# Altium PCB LeggieroRevB.PcbDoc
Units mil, origin at the board's own origin, x right, y up, seen from the top; angles counter-clockwise.
Board outline 2720 x 2260 mil, 4 copper layers (L1, L2, L3, L4), stack 61.2 mil thick; 24 components, 19 nets, 89 pads, 137 vias.
Unrouted connection lines stored in the file: 28.
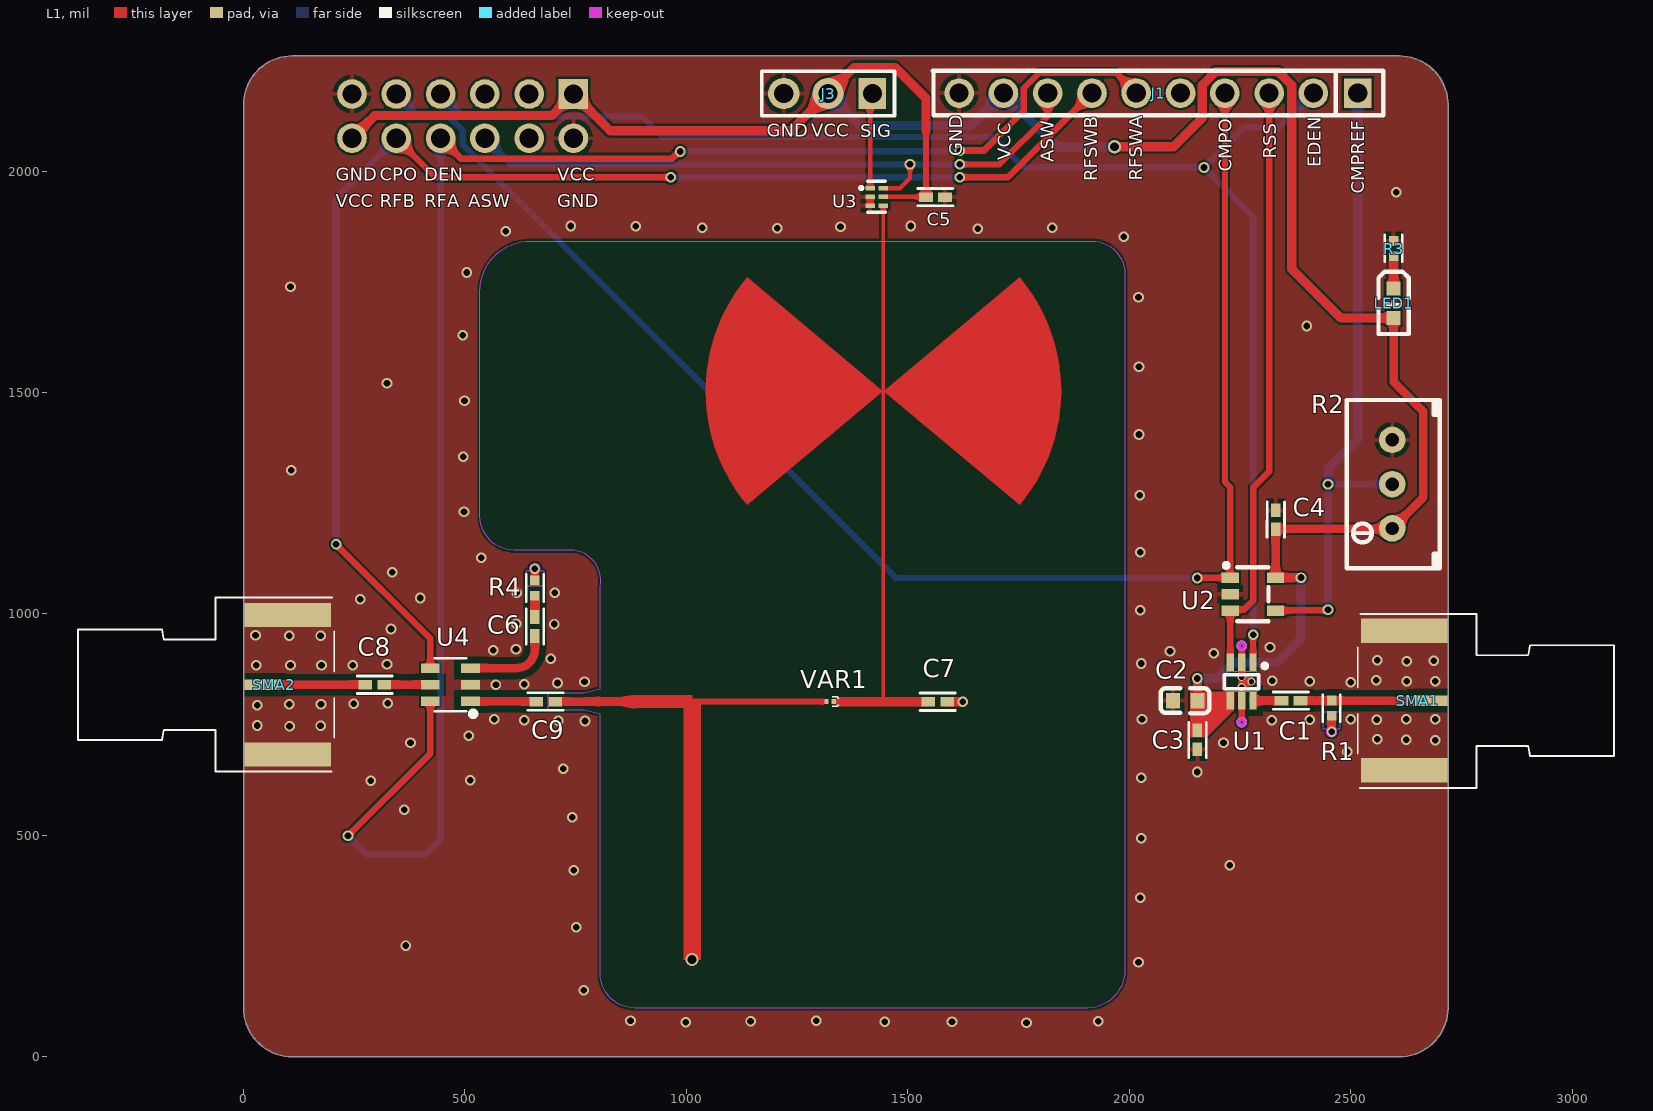
[diagram p0: L1 view]
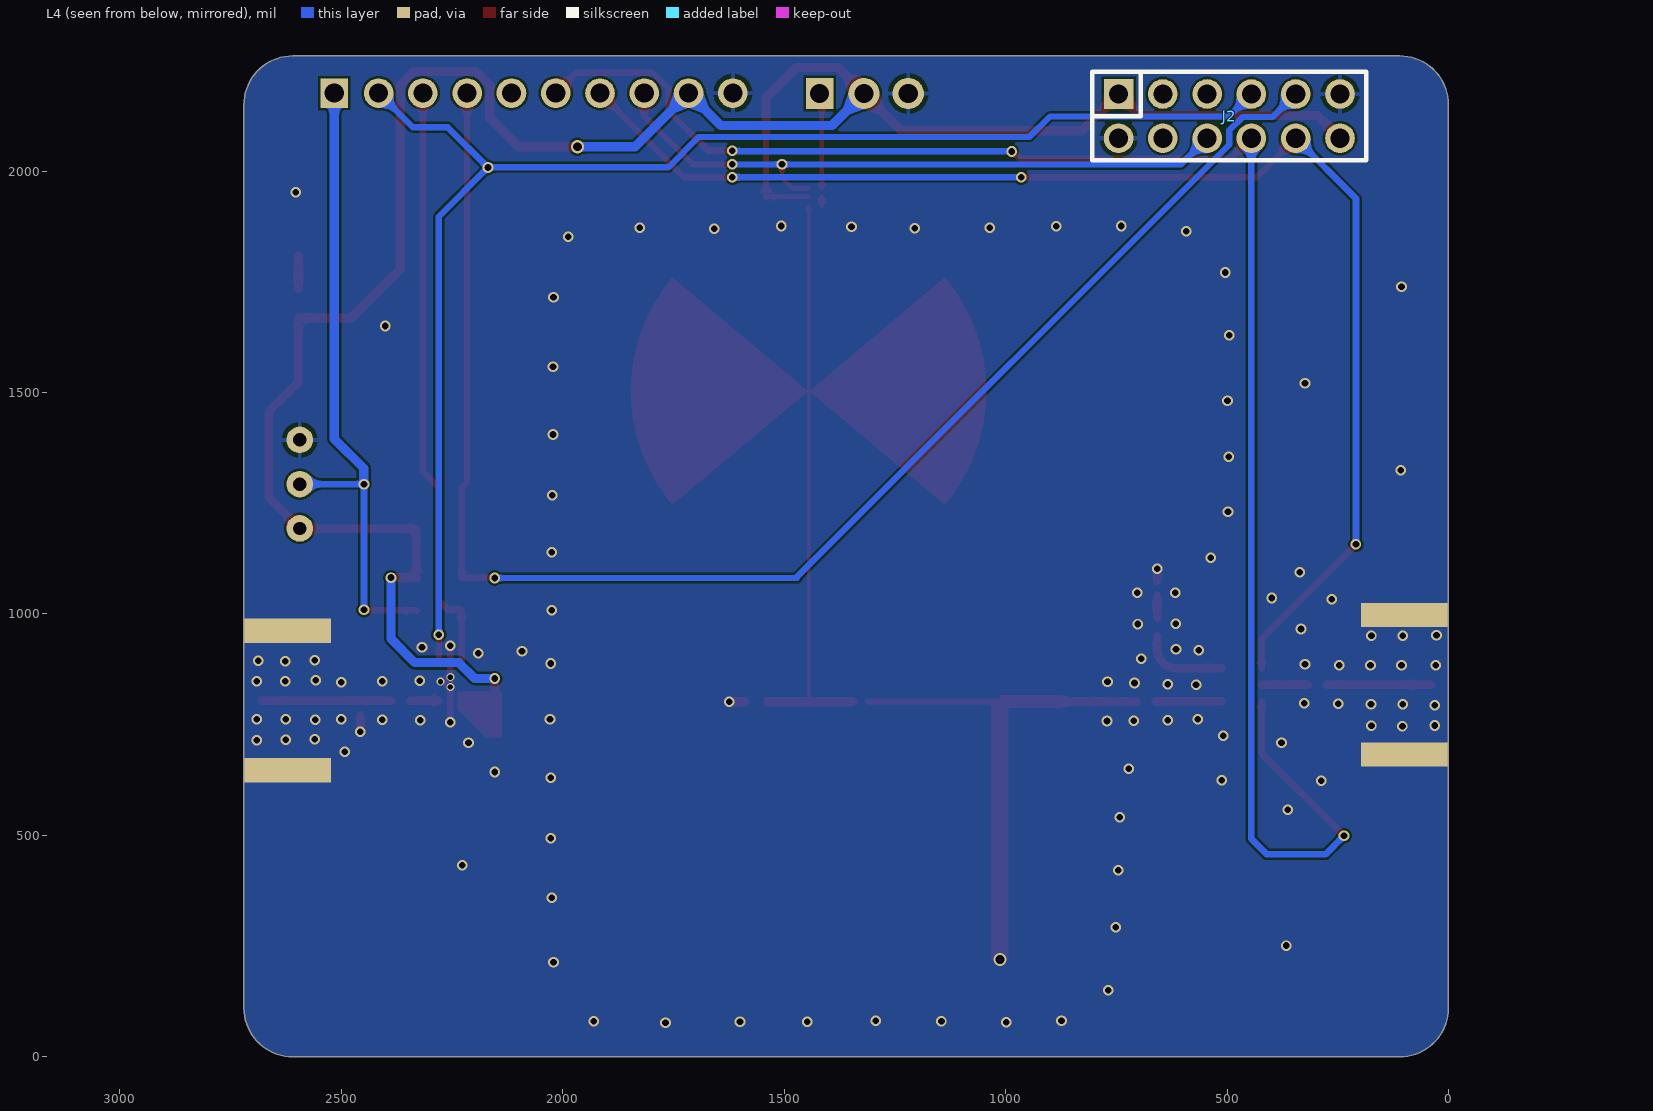
[diagram p1: L4 view, seen from below]
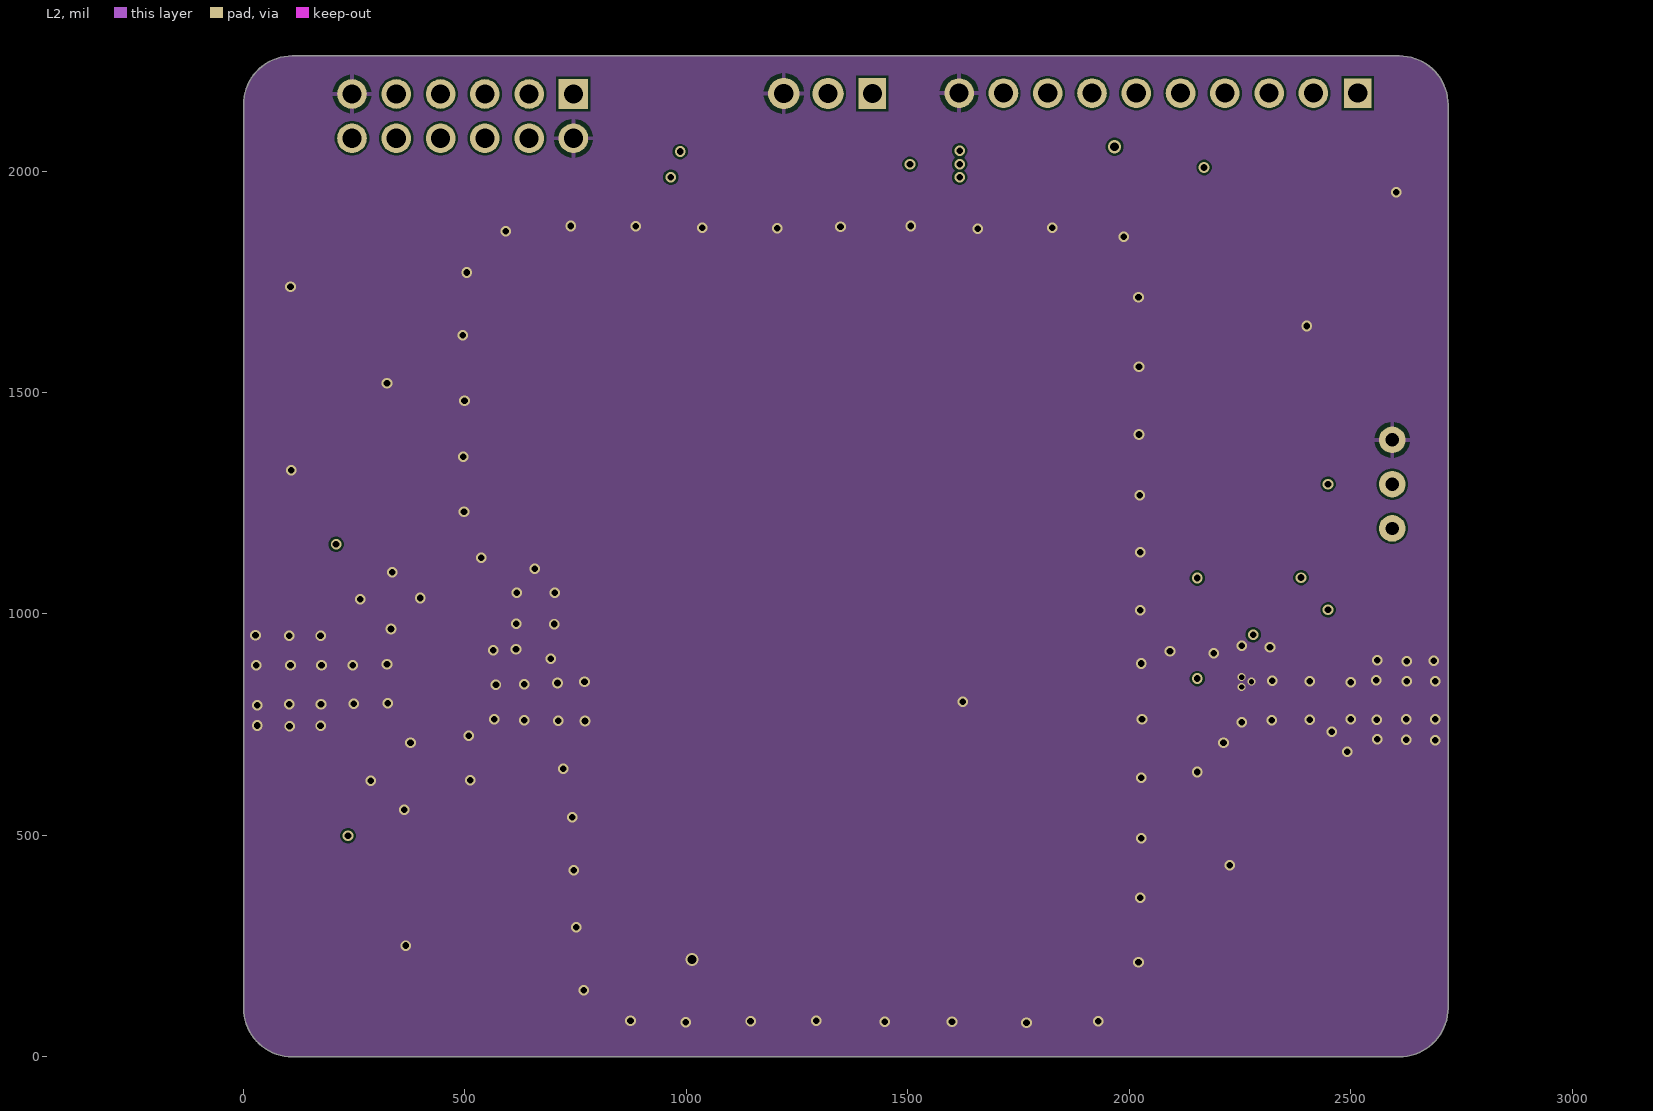
[diagram p2: L2]
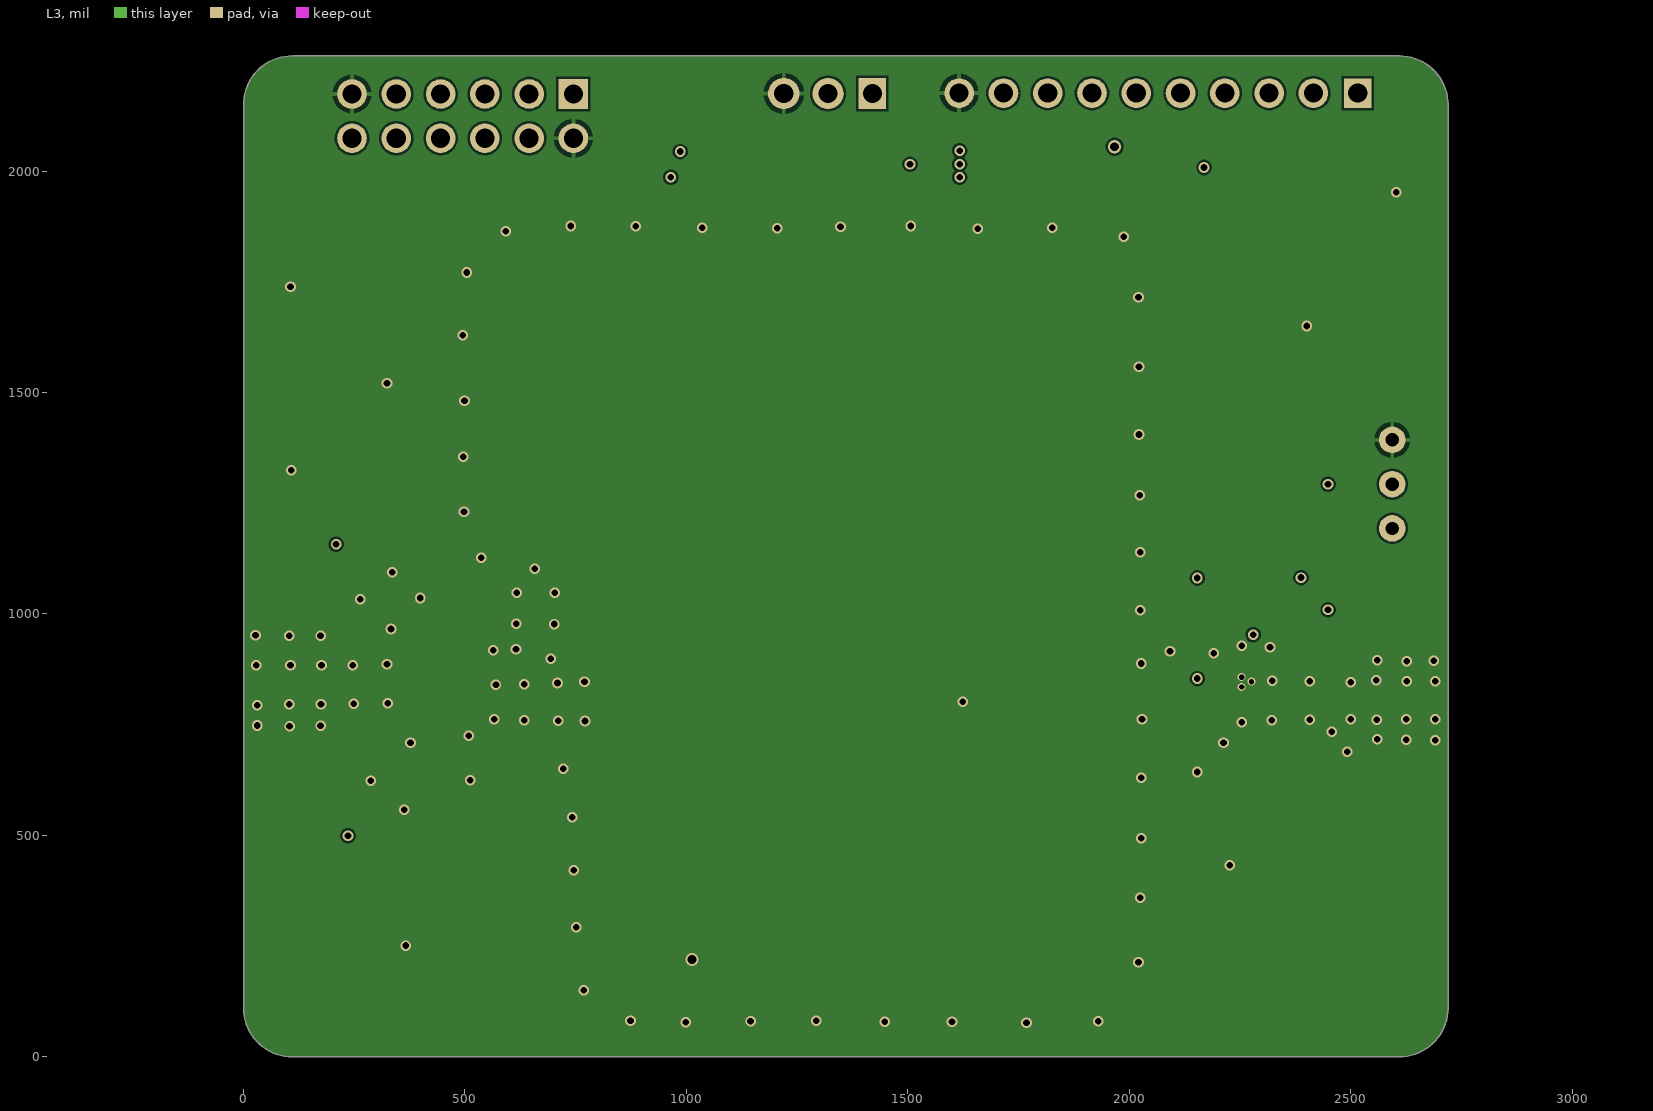
[diagram p3: L3]

## Layer stack, top to bottom
Top Solder: solder mask 0.6, Solder Resist, Dk 3.8
L1: signal copper 1.38
PP7628_1-2: prepreg 8.58, PP-7628, Dk 4.4
PP1080_1-2: prepreg 3.01, PP-1080, Dk 3.91
L2: signal copper 0.6
FR4Core: core 34.06, Core-7628A, Dk 4.6
L3: signal copper 0.6
PP1080_3-4: prepreg 3.01, PP-1080, Dk 3.91
PP7628_3-4: prepreg 8.58, PP-7628, Dk 4.4
L4: signal copper 1.38
Bottom Solder: solder mask 0.6, Solder Resist, Dk 3.8

## Board outline
110,0 cw(c110,110) 0,110 0,2150 cw(c110,2150) 110,2260 2610,2260 cw(c2610,2150) 2720,2150 2720,110 cw(c2610,110) 2610,0

## Design rules (kind name [scope] priority, off if disabled: settings)
Clearance Clearance_CPWG [InNetClass('CPWG') vs InNet('GND')] p1: gap=5 ignorepadtopadclearanceinfootprint=FALSE except(0: Arc-Hole Track-Hole SMDPad-Hole THPad-Hole Via-Hole Fill-Hole Poly-Hole Region-Hole Text-Hole; 10: SMDPad-Region; 15: Arc-Fill Arc-Poly Arc-Region Track-Fill Track-Poly Track-Region SMDPad-Fill SMDPad-Poly THPad-Fill THPad-Poly THPad-Region Via-Fill Via-Poly Via-Region Fill-Fill Fill-Poly Fill-Region Poly-Poly Poly-Region Region-Region)
Clearance [All] p2: gap=5 ignorepadtopadclearanceinfootprint=FALSE except(0: Arc-Hole Track-Hole SMDPad-Hole THPad-Hole Via-Hole Fill-Region Fill-Hole Poly-Hole Region-Region Region-Hole Text-Hole)
MinimumSolderMaskSliver [All] p1: minsoldermaskwidth=3
PolygonConnect PolygonConnect_No [(InComponent('C9') OR InComponent('R1') OR InComponent('R4'))] p1: connectstyle=NoConnect reliefconductorwidth=10 reliefentries=4 polygonreliefangle="90 Angle" airgapwidth=10 // Rule for No connect poly
PolygonConnect PolygonConnect_Direct [(HasFootprint('RF2203017') OR InComponent('U4'))] p2: connectstyle=Direct reliefconductorwidth=10 reliefentries=4 polygonreliefangle="90 Angle" airgapwidth=10 // Polygon connect rule for direct connect components
PolygonConnect [All] p3: thpad.connectstyle=Relief thpad.reliefconductorwidth=10 thpad.reliefentries=4 thpad.polygonreliefangle="90 Angle" thpad.airgapwidth=10 smdpad.connectstyle=Relief smdpad.reliefconductorwidth=10 smdpad.reliefentries=4 smdpad.polygonreliefangle="90 Angle" smdpad.airgapwidth=10 via.connectstyle=Direct via.reliefconductorwidth=10 via.reliefentries=4 via.polygonreliefangle="90 Angle" via.airgapwidth=10
RoutingVias [All] p1: holewidth=10 width=15 viastyle="Through Hole" minholewidth=7.87 minwidth=11.81 maxholewidth=40 maxwidth=50
SilkToSilkClearance [All] p1: silktosilkclearance=5
SilkToSolderMaskClearance [IsPad] p1: minsilkscreentomaskgap=2 clearancetoexposedcopper=TRUE
SolderMaskExpansion [All] p1: expansion=2 istentingtop=FALSE
Width Width_1 [InNetClass('CPWG')] p1: maxlimit=50 minlimit=19.23 preferedwidth=19.23
Width [All] p2: maxlimit=60 minlimit=3.5 preferedwidth=20.78
27 further rules are at their usual default settings.

## Classes and differential pairs
net class CPWG: NetC1_1 NetC1_2 NetC6_1 NetC6_2 NetC8_1 NetC8_2 NetC9_1

## Components (designator, comment, footprint, x,y, rotation, side; value= is the part's Value field where it differs from the comment)
C1 "1nF" C0402 2344,804 r0 top
C2 "100pF" C0603 2098.89,804 r0 top
C3 "0.1uF" C0402 2154,694.08 r90 top
C4 "0.1uF" C0402 2331,1234 r270 top
C5 "0.1uF" C0402 1541.08,1941 r0 top
C6 "27pF" C0402 658,950 r90 top
C7 "20pF" C0402 1546,801.6 r0 top
C8 "27pF" C0402 275.08,840 r0 top
C9 "27pF" C0402 661.08,802 r0 top
J1 "Header1x10P" Header1x10P 2516,2176 r180 top
J2 "Header2x6P" Header2x6P 745,2174 r180 bottom
J3 "Header1x3P" Header1x3P 1420,2175 r180 top
LED1 "LED" LED0603 2597,1668 r270 top
R1 "47Ohm" R0402 2457,769.92 r90 top
R2 "3296W-1-103LF" 3296W-1-103LF 2594,1193 r180 top
R3 "1kOhm" R0402 2597,1842.08 r270 top
R4 "49.9Ohm" R0402 658,1075.08 r270 top
SMA1 "RF2203017" RF2203017 2681,804 r270 top
SMA2 "RF2203017" RF2203017 40,840 r90 top
U1 "LT5534ESC6" LT5534ESC6#TRPBF 2279.59,891 r180 top
U2 "TLV3201AIDBVR" TLV3201AIDBVR 2228,1081.8 r180 top
U3 "XS3A1T3157GMX" XSON6_115 1415.08,1961.37 r270 top
U4 "HMC221BE" SOT-23-6 512.48,802.6 r90 top
VAR1 "MAVR-000120" D0201 1333.02,802.1 r180 top

## Footprints (in the part's own frame and the unit in brackets; to place one, negate y for a bottom-side part, rotate by r counter-clockwise, add the part's x,y. Pads: shape width x height; smd on the part's side, far side on the other; paste and mask are expansions set on the pad)
3296W-1-103LF [mil] "C34846"
  round 60 hole 30: 1(0,0) 2(0,-100) 3(0,-200)
  silkscreen extent -108,-290 102,90
C0402 [mm]
  rect 0.79x0.54 smd paste-100 mask+0.051: 1(0,0) 2(1.09,0)
  silkscreen extent -0.47,-0.5 1.55,0.5
C0603 [mm]
  rect 0.8x0.9 smd: 1(0,0) 2(1.4,0)
  silkscreen extent -0.71,-0.71 2.09,0.72
D0201 [mm] "MAVR-000120-1411 C5139746"
  rect 0.243x0.268 smd paste+0 mask+0.05: 1(0,0)
  rect 0.243x0.268 smd mask+0.05: 2(0.42,0)
  silkscreen extent -0.29,-0.27 0.1,0.28
Header1x3P [mm]
  rect 1.575x1.8 hole 1.1: 1(0,0)
  round 1.8 hole 1.1: 2(2.54,0) 3(5.08,0)
  silkscreen extent -1.27,-1.27 6.35,1.27
Header1x10P [mm]
  rect 1.575x1.7 hole 1.1: 1(0,0)
  round 1.7 hole 1.1: 2(2.54,0) 3(5.08,0) 4(7.62,0) 5(10.16,0) 6(12.7,0) 7(15.24,0) 8(17.78,0) 9(20.32,0) 10(22.86,0)
  silkscreen extent -1.47,-1.27 24.38,1.27
Header2x6P [mm]
  rect 1.7x1.7 hole 1.1: 1(0,0)
  round 1.7 hole 1.1: 2(0,-2.54) 3(2.54,0) 4(2.54,-2.54) 5(5.08,0) 6(5.08,-2.54) 7(7.62,0) 8(7.62,-2.54) 9(10.16,0) 10(10.16,-2.54) 11(12.7,0) 12(12.7,-2.54)
  silkscreen extent -1.5,-3.81 14.2,1.27
LED0603 [mm]
  rect 0.8x0.8 smd: 1(0,0) 2(-1.702,0)
  silkscreen extent -2.67,-0.86 0.91,0.86
LT5534ESC6#TRPBF [mm]
  rect 0.42x1 smd: 1(0,0) 2(0.65,0) 3(1.3,0) 4(1.3,2.21) 5(0.65,2.21) 6(0,2.21)
  silkscreen extent -0.8,0.09 1.66,1.52
R0402 [mm]
  rect 0.566x0.54 smd paste-100 mask+0.051: 1(0,0) 2(0.866,0)
  silkscreen extent -0.35,-0.5 1.2,0.5
RF2203017 [mm] "C2982575"
  rect 0.61x1.97 smd: 1(0,0)
  rect 1.4x5 smd: 2(4,-1.515) 3(-4,-1.515)
  rect 1.4x5 smd far side: 4(4,-1.515) 5(-4,-1.515)
  silkscreen extent -4.98,-4.19 5,10.52
SOT-23-6 [mil] "HMC221BE C1526247"
  rect 20.95x42.2 smd: 1(0,0) 2(37.4,0) 3(74.8,0) 4(74.8,90.48) 5(37.4,90.48) 6(0,90.48)
  silkscreen extent -34,-12 97,80
TLV3201AIDBVR [mm]
  rect 1x0.6 smd: 1(0,0) 2(0,0.95) 3(0,1.9) 4(-2.6,1.9) 5(-2.6,0)
  silkscreen extent -2.2,-0.83 0.35,2.5
XSON6_115 [mm]
  rect 0.25x0.55 smd mask+0.051: 1(0,0) 2(0.5,0) 3(1,0) 4(1,0.76) 5(0.5,0.76) 6(0,0.76)
  silkscreen extent -0.39,-0.56 1.39,0.87

## Part data
C1: library part Cap, "C597016"
C2 C3 C4 C5 C7: library part Cap
C6 C8 C9: library part Cap, "C88883"
J1: "C5156617"
J2: "C92269"
J3: "C7430359"
R1: library part Res, "C491103"
R2: "C34846"
R3: library part Res
R4: library part Res, "C851030"
SMA1 SMA2: "C2982575"
U1: "C459867"
U2: "C105188"
U3: "C3657276"
U4: "C1526247"
VAR1: "C5139746"

## Via types
v1: diameter 24, hole 15, L1 to L4, tented both sides, 132 vias
v2: diameter 18, hole 12, L1 to L4, tented both sides, 3 vias
v3: diameter 30, hole 20, L1 to L4, tented both sides, 2 vias

## Nets (pads, with @x,y where several pads share a name; then routed paths per layer and width w, separated by ;. In a path a pad name is that pad's centre, name@x,y a point inside that pad or via, vN(x,y) a via of type N, cw(c..) or ccw(c..) an arc to the next point about the centre after c; other vN are vias at no path point)
ASIG: J3.1 U3.1 | length 215.7
  L1 w10: U3.1 1415.08,2170.08 J3.1
ASWSEL: J1.8 J2.6 U3.6 | length 1493
  L1 w10: U3.6 1482.37,1961.37 1505,1984 v1(1505,2015)
  L1 w14: v1(1617,2015) 1707,2015 1816,2124 J1.8
  L4 w14: J2.6 604,2015 v1(1505,2015) v1(1617,2015)
CMPOUT: J1.4 J2.9 U2.1 | length 3456.9
  L1 w14: v1(2154,1081) 2154.4,1081.4 2227.6,1081.4 U2.1 2228,1286 2216,1298.01 J1.4
  L4 w14: J2.9 397,2122 465,2122 495,2092 495,2059.7 1473.7,1081 ; 1471,1081 v1(2154,1081)
CMPREF: J1.1 R2.2 U2.4 | length 1451.8
  L1 w15: U2.4 2331.36,1008 2448,1008 v1(2449,1009)
  L4 w15: v1(2449,1009) v1@2449,1285.56 ; v1(2449,1293) 2456.83,1293 R2.2
  L4 w20.78: v1(2449,1293) 2449.62,1293.62 2449.62,1328.62 2516,1395 J1.1
EDEN: J1.2 J2.7 U1.1 | length 3272.2
  L1 w14: U1.1 2279.8,891.2 2279.8,952.8 v1(2280,953)
  L4 w14: J2.7 496,2123 900.15,2123 946.15,2077 1693,2077 1761.25,2008.75 2168.25,2008.75 v1@2169,2008.75 ; v1(2169,2008) 2280,1897 v1(2280,953)
  L4 w15: v1(2169,2008) 2260,2099 2339,2099 J1.2
GND: C2.1 C3.1 C4.1 C5.2 C7.2 C9.2 J1.10 J2.2 J2.11 J3.3 R1.1 R2.3 R3.1 R4.1 SMA1.2 SMA1.3 SMA1.4 SMA1.5 SMA2.2 SMA2.3 SMA2.4 SMA2.5 U1.2 U1.5 U2.2 U3.2 U3.3 U4.2 VAR1.2 | length 484.2
  L1 w10: U3.3 U3.2
  L1 w15: v1(2254,755.26) v2(2254,835) 2254,846 ; v1(2254,928) U1.2 v2(2254,857) 2254,846 ; v2(2276,847) 2275.43,846.43 2254.43,846.43 2254,846
  L1 w19.23: R4.1 v1(658,1102) ; C9.2 799,802 ; v1(2457,734) R1.1
  L1 w20.78: 799,802 875,802 ; C7.2 v1(1624.4,801.6)
  other v1: 1768,77 999,78 1448,79 1600,79 1145,80 1930,80 874,81 1293,81 768,150 2021,213 366,251 751,292 2025,359 746,421 2227,432 2027,493 742,541 363,558 287,623 512,624 2027,630 2154,643 722,650 2492,689 377,709 2213,709 2691,715 2626,716 2560,717 509,725 104,746 174,747 31,748 771,758 711,759 634,760 2322,760 2408,761 2559,761 566,762 2029,762 2500,762 2626,762 2691,762 31,794 103,796 175,796 249,797 326,798 570,840 634,841 709,844 2500,846 770,847 2408,848 2627,848 2691,848 2323,849 2558,850 29,884 106,884 176,884 247,884 324,886 2027,888 2627,893 2688,894 2560,895 694,899 2191,911 2092,916 564,918 615.4,920 2318,925 103,951 174,951 27,952 333,966 702,977 616,978 2025,1008 264,1033 399,1036 617,1048 703,1048 336,1094 537,1127 2025,1139 498,1231 2024,1268 108,1324 496,1355 2022,1405 499,1481 324,1521 2022,1558 495,1629 2401,1650 2021,1715 106,1739 504,1771 1988,1852 592,1864 1658,1870 1205,1871 1036,1872 1826,1872 1348,1874 886,1875 739,1876 1507,1876 2603,1952
  other v3: 1012.77,219.4
NetC1_1: C1.1 U1.6 | length 64.4
  L1 w19.23: U1.6 C1.1
NetC1_2: C1.2 R1.2 SMA1.1 | length 294.1
  L1 w19.23: C1.2 R1.2 SMA1.1
NetC6_1: C6.1 U4.3 | length 199.8
  L1 w19.23: U4.3 615.4,877.4 ccw(c615.4,920) 658,920 C6.1
NetC6_2: C6.2 R4.2 | length 48.1
  L1 w19.23: C6.2 R4.2
NetC7_1: C7.1 U3.4 VAR1.1 | length 320.5
  L1 w8: 1445,1601.53 U3.4
NetC8_1: C8.1 SMA2.1 | length 235.1
  L1 w19.23: SMA2.1 C8.1
NetC8_2: C8.2 U4.5 | length 104
  L1 w19.23: C8.2 U4.5
NetC9_1: C9.1 U4.1 | length 149.2
  L1 w19.23: U4.1 661.08,802.6 C9.1
NetLED1_2: LED1.2 R3.2 | length 73
  L1 w20.78: LED1.2 R3.2
RFSWA: J1.6 J2.8 U4.6 | length 3922.8
  L1 w15: v1(236,499) 422,685 U4.6 ; J2.8 490.96,2028.04 967.6,2028.04 983.56,2044 v1(986,2044) ; v1(1617,2046) 1617.5,2046.5 1672.5,2046.5 1761.96,2135.96 1761.96,2186.97 1796.96,2221.96 1970.04,2221.96 J1.6
  L4 w15: v1(236,499) 278,457 410,457 445,492 J2.8 ; v1(986,2044) 987,2045 1616,2045 v1(1617,2046)
RFSWB: J1.7 J2.10 U4.4 | length 3028
  L1 w15: v1(209,1157) 422,944 U4.4 ; J2.10 433,1986 v1(965,1986) ; v1(1617,1986) 1726,1986 J1.7
  L4 w15: v1(209,1157) 209,1938 J2.10 ; v1@965.5,1986.5 v1(965,1986) v1(1617,1986)
RSS: J1.3 U1.3 U2.3 | length 1338.2
  L1 w15: U2.3 2230.52,1009.55 2259.18,1009.55 2280,1030.37 2280,1285 2316,1321 J1.3 ; U1.3 U2.3@2228.38,1007
VCC_3V3: C2.2 C3.2 C4.2 C5.1 J1.9 J2.1 J2.12 J3.2 LED1.1 R2.1 U1.4 U2.5 U3.5 | length 5176
  L1 w10: U3.5 1445.08,1941.61 1540.47,1941.61 1541,1941.08 C5.1
  L1 w14: C5.1@1541,1941.08 1541,2090
  L1 w19.23: U2.5@2330.47,1081.9 2330.68,1082.11 2330.68,1190.76 C4.2 2331.96,1192.04 2593.04,1192.04 R2.1 2664,1263.01 2664,1457 2597,1524 LED1.1
  L1 w20.78: J2.12 296.15,2125.15 696.15,2125.15 J2.1 828,2091 1236,2091 J3.2 1379,2234 1471,2234 1541,2164 1541,2090 ; v3(1967,2055) 2100,2055 2164.85,2119.85 2164.85,2193.95 2195.76,2224.85 2336.24,2224.85 2367.15,2193.95 2367.15,1778.85 2478,1668 LED1.1 ; C2.2 v1(2154,854) ; U2.5 2330.47,1081.9 2387.9,1081.9 v1(2388,1082)
  L4 w20.78: J3.2 1392,2103 1643,2103 J1.9 1837,2055 v3(1967,2055) ; v1(2154,854) 2199,854 2235,890 2334,890 2388,944 v1(2388,1082)
pads on no net: J1.5 J2.3 J2.4 J2.5

## Polygon pours and split planes (outlines as drawn)
GND on L2 "L2GND" (solid, remove dead copper, pour order 0): 0,110 0,2150 cw(c110,2150) 110,2260 2610,2260 cw(c2610,2150) 2720,2150 2720,110 cw(c2610,110) 2610,0 110,0 cw(c110,110)
GND on L3 "L3GND" (solid, remove dead copper, pour order 1): 110,2260 2610,2260 cw(c2610,2150) 2720,2150 2720,110 cw(c2610,110) 2610,0 110,0 cw(c110,110) 0,110 0,2150 cw(c110,2150)
GND on L1 "L1GND" (solid, remove dead copper, pour order 4): 110,2260 2610,2260 cw(c2610,2150) 2720,2150 2720,110 cw(c2610,110) 2610,0 110,0 cw(c110,110) 0,110 0,2150 cw(c110,2150)
GND on L4 "L4GND" (solid, remove dead copper, pour order 2): 110,2260 2610,2260 cw(c2610,2150) 2720,2150 2720,110 cw(c2610,110) 2610,0 110,0 cw(c110,110) 0,110 0,2150 cw(c110,2150)

## Keep-outs
L1:
  circle w10: c2254,928 r7.14
  circle w10: c2254,755.26 r7.19
  region: 688,782.16 688,821.69 769.08,821.69 805,831.17 805,1061.39 ccw(c738.02,1075.53) 738,1144 611,1144 cw(c610.99,1220.99) 534,1221 534,1728 cw(c647.99,1728) 648,1842 853.71,1842 1916,1842 cw(c1916,1768) 1990,1768 1990,195 cw(c1905,195) 1905,110 884,110 cw(c884,189) 805,189 805,773.66 769.08,782.16
  region: 2437,777.87 2437,740.67 2446.99,740.67 ccw(c2457.04,734.12) 2467.1,740.67 2477,740.67 2477,777.87
  region: 637.37,1064 678.63,1064 678.63,1096.22 668.55,1096.22 ccw(c658.18,1102.04) 658.35,1113.94 ccw(c658.18,1101.81) 647.41,1096.22 637.37,1096.22
  region: 2219,871 2288,871 2288,824 2219,824

## Other copper
L1:
  rectangle net NetC7_1: 1345.5,791.19 1545.5,811.97
  rectangle net GND: 795,791.61 805,812.39
  region net NetC7_1: 1449,1493 1449,1603 1441,1603 1441,1493
  region net NetC7_1: 1449,811 1449,1503 1441,1503 1441,811
  region net GND: 993,788 993,218.26 1032.63,218.26 1032.63,788
  rectangle net GND: 1031,794.95 1310.13,808.77
  rectangle net GND: 876,787 994,816.77
  region net NetC7_1: 1446,1503 1752.42,1760.11 cw(c1446,1503) 1752.42,1245.89
  region net NetC7_1: 1137.58,1245.89 cw(c1444,1503) 1137.58,1760.12 1444,1503
  region net GND: 993,816.77 1013,816.77 1013,808.77 1032.63,808.77 1032.63,787 993,787
  region net GND: 876.06,816.77 854,812.39 854,791.61 876.06,787 885.94,787 885.94,816.77
  region net GND: 2250.45,827 2250.45,865 2257.49,865 2282.21,850.36 2282.21,844.97 2257.75,827
  region net NetC7_1: 1334.5,807.38 1345.5,811.97 1358.5,811.97 1358.5,791.19 1345.5,791.19 1334.5,796.81
  region net GND: 805,812.39 795,812.39 767.95,811.58 767.95,792.38 795,791.61 805,791.61
  region net VCC_3V3: 2237,824 2138,824 2138,721 2175,721 2237,783
  region net GND: 1305.99,808.77 1310.13,808.77 1316.48,805.96 1316.48,798.91 1310.13,794.95 1306.01,794.95

## Silkscreen, mask and mechanical layers (free items; w line width, h text height)
Top Overlay:
  text "GND" at 1181,2077 h30
  text "VCC" at 1282,2077 h30
  text "SIG" at 1393,2076 h30
  text "GND" at 1623,2033 h30 r90
  text "RSS" at 2332,2028 h30 r90
  text "VCC" at 1732,2024 h30 r90
  text "ASW" at 1830,2020 h30 r90
  text "EDEN" at 2432,2008 h30 r90
  text "CMPO" at 2232,1998 h30 r90
  text "GND" at 208,1978 h30
  text "CPO" at 308,1978 h30
  text "DEN" at 408,1978 h30
  text "VCC" at 708,1978 h30
  text "RFSWA" at 2029,1978 h30 r90
  text "RFSWB" at 1928,1977 h30 r90
  text "CMPREF" at 2531,1949 h30 r90
  text "VCC" at 208,1918 h30
  text "RFB" at 308,1918 h30
  text "RFA" at 408,1918 h30
  text "ASW" at 508,1918 h30
  text "GND" at 708,1918 h30
Mechanical 1:
  the board outline again, w5

## Text inside footprints (layer, text, board x,y; h text height)
SMA1: Mechanical 13 "PCB End" at 2759,913 h32 r270; Mechanical 13 "PCB Thincness 1.6mm" at 2803,894 h12 r270
SMA2: Mechanical 13 "PCB Thincness 1.6mm" at -82,750 h12 r90; Mechanical 13 "PCB End" at -38,731 h32 r90